# Altium PCB MBD-SM.PcbDoc
Units mm, origin at the board's own origin, x right, y up, seen from the top; angles counter-clockwise.
Board outline 160 x 184 mm, 2 copper layers (Top Layer, Bottom Layer); 73 components, 70 nets, 262 pads, 5 vias.
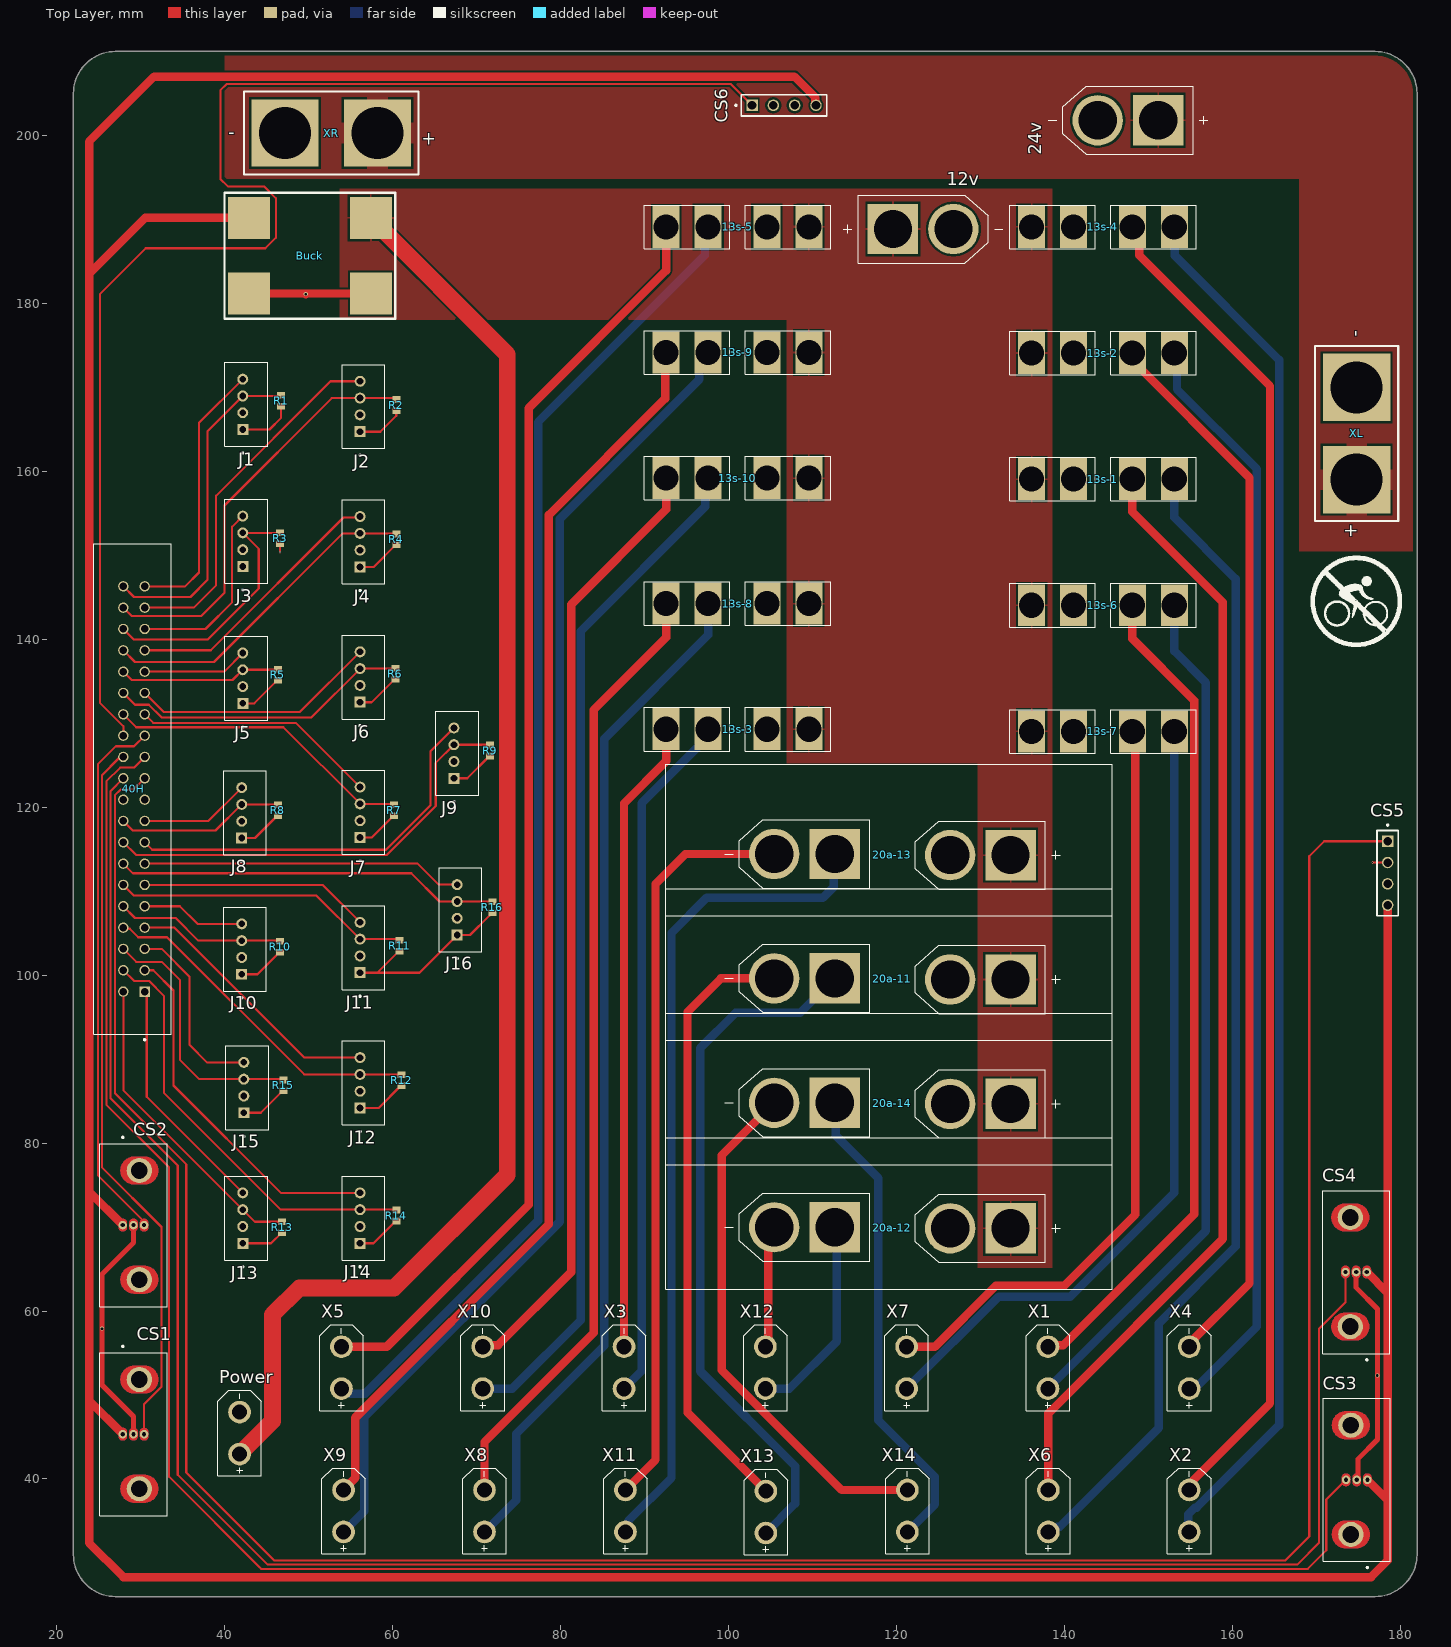
[diagram p0: Top Layer view]
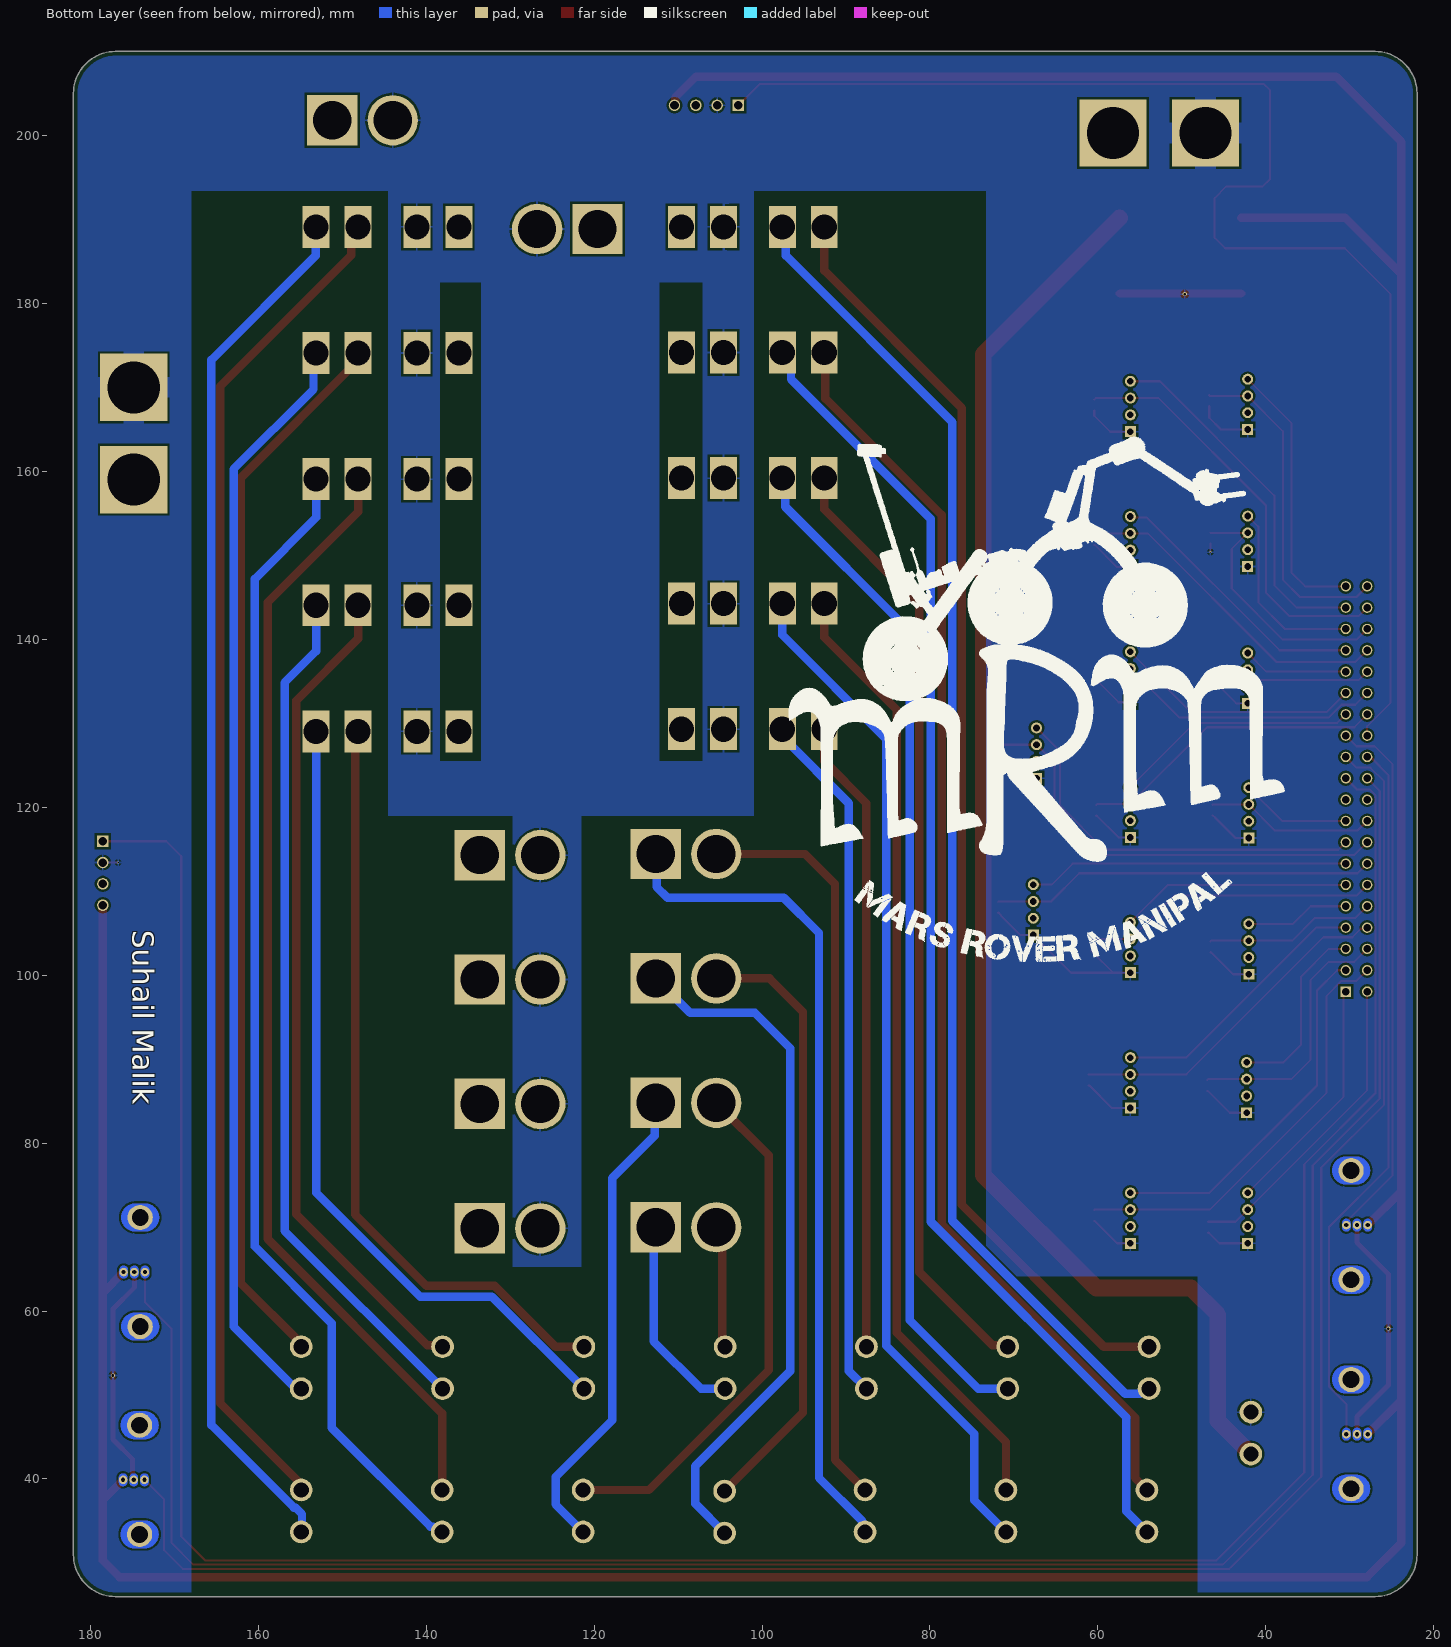
[diagram p1: Bottom Layer view, seen from below]

## Layer stack, top to bottom
Top Solder: solder mask 0.0102, Solder Resist, Dk 3.5
Top Layer: signal copper 0.0356
Dielectric 1: dielectric 0.32, FR-4, Dk 4.8
Bottom Layer: signal copper 0.0356
Bottom Solder: solder mask 0.0102, Solder Resist, Dk 3.5

## Board outline
22,31 22,205 cw(c27,205) 27,210 177,210 cw(c177,205) 182,205 182,31 cw(c177,31) 177,26 27,26 cw(c27,31)

## Design rules (kind name [scope] priority, off if disabled: settings)
Clearance [All] p1: gap=0.254 ignorepadtopadclearanceinfootprint=FALSE
PolygonConnect [All] p1: connectstyle=Relief reliefconductorwidth=0.254 reliefentries=4 polygonreliefangle="90 Angle" airgapwidth=0.254
RoutingVias [All] p1: holewidth=0.711 width=1.27 viastyle="Through Hole" minholewidth=0.01 minwidth=0.01 maxholewidth=0.711 maxwidth=1.27
SolderMaskExpansion [All] p1: expansion=0.102 istentingtop=FALSE
SupplyNets "Schematic Supply Nets" [InNet('GND')] p1: voltage=0.000
Width [All] p1: maxlimit=2 minlimit=0.254 preferedwidth=0.254 minimp=50.000000 maximp=50.000000 favimp=50.000000
30 further rules are at their usual default settings.

## Components (designator, comment, footprint, x,y, rotation, side; value= is the part's Value field where it differs from the comment)
12v "XT60-M" AMASS_XT60-M 123.19,188.849 r0 top
13s-1 "md_vertical" md_vertical 148.069,159.067 r90 top
13s-2 "md_vertical" md_vertical 148.069,174.085 r90 top
13s-3 "md_vertical" md_vertical 97.613,129.286 r270 top
13s-4 "md_vertical" md_vertical 148.069,189.103 r90 top
13s-5 "md_vertical" md_vertical 97.613,189.103 r270 top
13s-6 "md_vertical" md_vertical 148.069,144.05 r90 top
13s-7 "md_vertical" md_vertical 148.069,129.032 r90 top
13s-8 "md_vertical" md_vertical 97.613,144.24 r270 top
13s-9 "md_vertical" md_vertical 97.613,174.149 r270 top
13s-10 "md_vertical" md_vertical 97.613,159.195 r270 top
20a-11 "MD 20 A" MD20A 118.574,94.276 r0 top
20a-12 "MD 20 A" MD20A 118.574,64.643 r0 top
20a-13 "MD 20 A" MD20A 118.574,109.093 r0 top
20a-14 "MD 20 A" MD20A 118.574,79.46 r0 top
24v "XT60-M" AMASS_XT60-M 147.574,201.803 r180 top
40H "3-1761603-3" TE_3-1761603-3 30.48,98.044 r90 top
Buck "microbuck" "Micro buck" 50.165,185.674 r270 top
CS1 "WCS1700" XDCR_WCS1700 29.146,45.339 r270 top
CS2 "WCS1700" XDCR_WCS1700 29.146,70.231 r270 top
CS3 "WCS1700" XDCR_WCS1700 174.817,39.901 r90 top
CS4 "WCS1700" XDCR_WCS1700 174.752,64.643 r90 top
CS5 "MTSW-104-07-G-S-170" SAMTEC_MTSW-104-07-G-S-170 178.498,112.141 r90 top
CS6 "MTSW-104-07-G-S-170" SAMTEC_MTSW-104-07-G-S-170 106.617,203.581 r180 top
J1 "110990030" SEEED_110990030 42.164,167.973 r90 top
J2 "110990030" SEEED_110990030 56.134,167.719 r90 top
J3 "110990030" SEEED_110990030 42.164,151.67 r90 top
J4 "110990030" SEEED_110990030 56.134,151.611 r90 top
J5 "110990030" SEEED_110990030 42.164,135.366 r90 top
J6 "110990030" SEEED_110990030 56.134,135.503 r90 top
J7 "110990030" SEEED_110990030 56.134,119.396 r90 top
J8 "110990030" SEEED_110990030 42.037,119.332 r90 top
J9 "110990030" SEEED_110990030 67.31,126.444 r90 top
J10 "110990030" SEEED_110990030 42.037,103.108 r90 top
J11 "110990030" SEEED_110990030 56.134,103.288 r90 top
J12 "110990030" SEEED_110990030 56.134,87.18 r90 top
J13 "110990030" SEEED_110990030 42.164,71.072 r90 top
J14 "110990030" SEEED_110990030 56.134,71.072 r90 top
J15 "110990030" SEEED_110990030 42.291,86.614 r90 top
J16 "110990030" SEEED_110990030 67.691,107.775 r90 top
Power "XT30UPB-M" XT30UPB-M 41.783,45.466 r90 top
R1 "CRCW060310K0FKEA" RESC1609X50X30NL8T20 46.736,168.402 r270 top
R2 "CRCW060310K0FKEA" RESC1609X50X30NL8T20 60.452,167.894 r270 top
R3 "CRCW060310K0FKEA" RESC1609X50X30NL8T20 46.609,152.019 r270 top
R4 "CRCW060310K0FKEA" RESC1609X50X30NL8T20 60.452,151.892 r270 top
R5 "CRCW060310K0FKEA" RESC1609X50X30NL8T20 46.355,135.763 r270 top
R6 "CRCW060310K0FKEA" RESC1609X50X30NL8T20 60.325,135.89 r270 top
R7 "CRCW060310K0FKEA" RESC1609X50X30NL8T20 60.198,119.634 r270 top
R8 "CRCW060310K0FKEA" RESC1609X50X30NL8T20 46.355,119.649 r270 top
R9 "CRCW060310K0FKEA" RESC1609X50X30NL8T20 71.628,126.746 r270 top
R10 "CRCW060310K0FKEA" RESC1609X50X30NL8T20 46.609,103.378 r270 top
R11 "CRCW060310K0FKEA" RESC1609X50X30NL8T20 60.833,103.505 r270 top
R12 "CRCW060310K0FKEA" RESC1609X50X30NL8T20 61.087,87.503 r270 top
R13 "CRCW060310K0FKEA" RESC1609X50X30NL8T20 46.863,69.977 r270 top
R14 "CRCW060310K0FKEA" RESC1609X50X30NL8T20 60.452,71.374 r270 top
R15 "CRCW060310K0FKEA" RESC1609X50X30NL8T20 46.99,86.868 r270 top
R16 "CRCW060310K0FKEA" RESC1609X50X30NL8T20 71.882,108.077 r270 top
X1 "XT30UPB-M" XT30UPB-M 138.049,53.253 r90 top
X2 "XT30UPB-M" XT30UPB-M 154.876,36.195 r90 top
X3 "XT30UPB-M" XT30UPB-M 87.566,53.253 r90 top
X4 "XT30UPB-M" XT30UPB-M 154.876,53.253 r90 top
X5 "XT30UPB-M" XT30UPB-M 53.911,53.253 r90 top
X6 "XT30UPB-M" XT30UPB-M 138.091,36.195 r90 top
X7 "XT30UPB-M" XT30UPB-M 121.221,53.253 r90 top
X8 "XT30UPB-M" XT30UPB-M 70.951,36.195 r90 top
X9 "XT30UPB-M" XT30UPB-M 54.165,36.195 r90 top
X10 "XT30UPB-M" XT30UPB-M 70.739,53.253 r90 top
X11 "XT30UPB-M" XT30UPB-M 87.736,36.195 r90 top
X12 "XT30UPB-M" XT30UPB-M 104.394,53.253 r90 top
X13 "XT30UPB-M" XT30UPB-M 104.457,36.068 r90 top
X14 "XT30UPB-M" XT30UPB-M 121.306,36.195 r90 top
XL "xt90" xt90 174.815,164.504 r90 top
XR "xt90" xt90 52.705,200.279 r180 top

## Footprints (in the part's own frame and the unit in brackets; to place one, negate y for a bottom-side part, rotate by r counter-clockwise, add the part's x,y. Pads: shape width x height; smd on the part's side, far side on the other; paste and mask are expansions set on the pad)
AMASS_XT60-M [mm]
  round 6 hole 4.55: N(3.6,0)
  rect 6x6 / inner round 6 / far side rect 6x6 hole 4.55: P(-3.6,0)
  silkscreen extent -9.5,-4.05 9.5,4.05, body extent -7.75,-4.05 7.75,4.05, height 16
MD20A [mm]
  rect 6x6 / inner round 6 / far side rect 6x6 hole 4.55: 1(-5.925,5.334) 4(15.03,5.207)
  round 6 hole 4.55: 2(-13.125,5.334) 3(7.83,5.207)
  silkscreen extent -26.04,-2.03 27.14,16.02, body extent -17.27,1.16 19.18,9.38, height 16
md_vertical [mm]
  rect 5x3.2 hole 3: 1(0,11.97) 2(0,6.97) 3(0,-0.03) 4(0,-5.03)
  silkscreen extent -2.6,-7.63 2.6,14.57, body extent -2.6,-7.63 2.6,14.57, height 10.66
"Micro buck" [mm]
  rect 5x5 smd: 1(-4.5,7.25) 2(4.5,7.25) 3(-4.5,-7.25) 4(4.5,-7.25)
  silkscreen extent -7.5,-10.16 7.5,10.16
RESC1609X50X30NL8T20 [mm] "Chip Resistor, 2-Leads, Body 1.65x0.95mm, IPC Medium Density"
  rect 0.8x0.95 smd: 1(-0.65,0) 2(0.65,0)
  body extent -0.82,-0.48 0.82,0.48, height 0.5
SAMTEC_MTSW-104-07-G-S-170 [mm]
  rect 1.37x1.37 / inner round 1.37 / far side rect 1.37x1.37 hole 1.02: 01(3.81,0)
  round 1.37 hole 1.02: 02(1.27,0) 03(-1.27,0) 04(-3.81,0)
  silkscreen extent -5.08,-1.27 5.83,1.27
SEEED_110990030 [mm]
  rect 1.308x1.308 hole 0.8: 1(-3,0)
  round 1.308 hole 0.8: 2(-1,0) 3(1,0) 4(3,0)
  silkscreen extent -5.9,-2.95 5,2.15
TE_3-1761603-3 [mm]
  rect 1.24x1.24 hole 0.89: 1(0,0)
  round 1.24 hole 0.89: 2(0,2.54) 3(2.54,0) 4(2.54,2.54) 5(5.08,0) 6(5.08,2.54) 7(7.62,0) 8(7.62,2.54) 9(10.16,0) 10(10.16,2.54) 11(12.7,0) 12(12.7,2.54) 13(15.24,0) 14(15.24,2.54) 15(17.78,0) 16(17.78,2.54) 17(20.32,0) 18(20.32,2.54) 19(22.86,0) 20(22.86,2.54) 21(25.4,0) 22(25.4,2.54) 23(27.94,0) 24(27.94,2.54) 25(30.48,0) 26(30.48,2.54) 27(33.02,0) 28(33.02,2.54) 29(35.56,0) 30(35.56,2.54) 31(38.1,0) 32(38.1,2.54) 33(40.64,0) 34(40.64,2.54) 35(43.18,0) 36(43.18,2.54) 37(45.72,0) 38(45.72,2.54) 39(48.26,0) 40(48.26,2.54)
  silkscreen extent -5.83,-3.17 53.34,6.05
XDCR_WCS1700 [mm]
  round 1.008 hole 0.5 mask+0: 1(0,-1.27) 2(0,0) 3(0,1.27)
  round 3 hole 2 mask+0: SH1(-6.5,0.7) SH2(6.5,0.7)
  Top Layer region: 6.586,2.948 6.672,2.941 6.758,2.93 6.843,2.914 6.927,2.894 7.01,2.869 7.091,2.84 7.171,2.807 7.249,2.77 7.325,2.729 7.399,2.684 7.47,2.635 7.538,2.582 7.604,2.526 7.667,2.467 7.726,2.404 7.782,2.338 7.835,2.27 7.884,2.199 7.929,2.125 7.97,2.049 8.007,1.971 8.04,1.891 8.069,1.81 8.094,1.727 8.114,1.643 8.13,1.558 8.141,1.472 8.148,1.386 8.15,1.3 8.15,0.1 8.148,0.014 8.141,-0.072 8.13,-0.158 8.114,-0.243 8.094,-0.327 8.069,-0.41 8.04,-0.491 8.007,-0.571 7.97,-0.649 7.929,-0.725 7.884,-0.799 7.835,-0.87 7.782,-0.938 7.726,-1.004 7.667,-1.067 7.604,-1.126 7.538,-1.182 7.47,-1.235 7.399,-1.284 7.325,-1.329 7.249,-1.37 7.171,-1.407 7.091,-1.44 7.01,-1.469 6.927,-1.494 6.843,-1.514 6.758,-1.53 6.672,-1.541 6.586,-1.548 6.5,-1.55 6.414,-1.548 6.328,-1.541 6.242,-1.53 6.157,-1.514 6.073,-1.494 5.99,-1.469 5.909,-1.44 5.829,-1.407 5.751,-1.37 5.675,-1.329 5.601,-1.284 5.53,-1.235 5.462,-1.182 5.396,-1.126 5.333,-1.067 5.274,-1.004 5.218,-0.938 5.165,-0.87 5.116,-0.799 5.071,-0.725 5.03,-0.649 4.993,-0.571 4.96,-0.491 4.931,-0.41 4.906,-0.327 4.886,-0.243 4.87,-0.158 4.859,-0.072 4.852,0.014 4.85,0.1 4.85,1.3 4.852,1.386 4.859,1.472 4.87,1.558 4.886,1.643 4.906,1.727 4.931,1.81 4.96,1.891 4.993,1.971 5.03,2.049 5.071,2.125 5.116,2.199 5.165,2.27 5.218,2.338 5.274,2.404 5.333,2.467 5.396,2.526 5.462,2.582 5.53,2.635 5.601,2.684 5.675,2.729 5.751,2.77 5.829,2.807 5.909,2.84 5.99,2.869 6.073,2.894 6.157,2.914 6.242,2.93 6.328,2.941 6.414,2.948 6.5,2.95
  Top Layer region: -6.414,2.948 -6.328,2.941 -6.242,2.93 -6.157,2.914 -6.073,2.894 -5.99,2.869 -5.909,2.84 -5.829,2.807 -5.751,2.77 -5.675,2.729 -5.601,2.684 -5.53,2.635 -5.462,2.582 -5.396,2.526 -5.333,2.467 -5.274,2.404 -5.218,2.338 -5.165,2.27 -5.116,2.199 -5.071,2.125 -5.03,2.049 -4.993,1.971 -4.96,1.891 -4.931,1.81 -4.906,1.727 -4.886,1.643 -4.87,1.558 -4.859,1.472 -4.852,1.386 -4.85,1.3 -4.85,0.1 -4.852,0.014 -4.859,-0.072 -4.87,-0.158 -4.886,-0.243 -4.906,-0.327 -4.931,-0.41 -4.96,-0.491 -4.993,-0.571 -5.03,-0.649 -5.071,-0.725 -5.116,-0.799 -5.165,-0.87 -5.218,-0.938 -5.274,-1.004 -5.333,-1.067 -5.396,-1.126 -5.462,-1.182 -5.53,-1.235 -5.601,-1.284 -5.675,-1.329 -5.751,-1.37 -5.829,-1.407 -5.909,-1.44 -5.99,-1.469 -6.073,-1.494 -6.157,-1.514 -6.242,-1.53 -6.328,-1.541 -6.414,-1.548 -6.5,-1.55 -6.586,-1.548 -6.672,-1.541 -6.758,-1.53 -6.843,-1.514 -6.927,-1.494 -7.01,-1.469 -7.091,-1.44 -7.171,-1.407 -7.249,-1.37 -7.325,-1.329 -7.399,-1.284 -7.47,-1.235 -7.538,-1.182 -7.604,-1.126 -7.667,-1.067 -7.726,-1.004 -7.782,-0.938 -7.835,-0.87 -7.884,-0.799 -7.929,-0.725 -7.97,-0.649 -8.007,-0.571 -8.04,-0.491 -8.069,-0.41 -8.094,-0.327 -8.114,-0.243 -8.13,-0.158 -8.141,-0.072 -8.148,0.014 -8.15,0.1 -8.15,1.3 -8.148,1.386 -8.141,1.472 -8.13,1.558 -8.114,1.643 -8.094,1.727 -8.069,1.81 -8.04,1.891 -8.007,1.971 -7.97,2.049 -7.929,2.125 -7.884,2.199 -7.835,2.27 -7.782,2.338 -7.726,2.404 -7.667,2.467 -7.604,2.526 -7.538,2.582 -7.47,2.635 -7.399,2.684 -7.325,2.729 -7.249,2.77 -7.171,2.807 -7.091,2.84 -7.01,2.869 -6.927,2.894 -6.843,2.914 -6.758,2.93 -6.672,2.941 -6.586,2.948 -6.5,2.95
  Top Layer region: 0.276,-0.771 0.302,-0.773 0.328,-0.776 0.354,-0.781 0.379,-0.787 0.405,-0.794 0.429,-0.803 0.453,-0.813 0.477,-0.824 0.5,-0.837 0.522,-0.851 0.544,-0.865 0.565,-0.881 0.585,-0.898 0.604,-0.916 0.622,-0.935 0.639,-0.955 0.655,-0.976 0.669,-0.998 0.683,-1.02 0.696,-1.043 0.707,-1.067 0.717,-1.091 0.726,-1.115 0.733,-1.141 0.739,-1.166 0.744,-1.192 0.747,-1.218 0.749,-1.244 0.75,-1.27 0.749,-1.296 0.747,-1.322 0.744,-1.348 0.739,-1.374 0.733,-1.399 0.726,-1.425 0.717,-1.449 0.707,-1.473 0.696,-1.497 0.683,-1.52 0.669,-1.542 0.655,-1.564 0.639,-1.585 0.622,-1.605 0.604,-1.624 0.585,-1.642 0.565,-1.659 0.544,-1.675 0.522,-1.689 0.5,-1.703 0.477,-1.716 0.453,-1.727 0.429,-1.737 0.405,-1.746 0.379,-1.753 0.354,-1.759 0.328,-1.764 0.302,-1.767 0.276,-1.769 0.25,-1.77 -0.25,-1.77 -0.276,-1.769 -0.302,-1.767 -0.328,-1.764 -0.354,-1.759 -0.379,-1.753 -0.405,-1.746 -0.429,-1.737 -0.453,-1.727 -0.477,-1.716 -0.5,-1.703 -0.522,-1.689 -0.544,-1.675 -0.565,-1.659 -0.585,-1.642 -0.604,-1.624 -0.622,-1.605 -0.639,-1.585 -0.655,-1.564 -0.669,-1.542 -0.683,-1.52 -0.696,-1.497 -0.707,-1.473 -0.717,-1.449 -0.726,-1.425 -0.733,-1.399 -0.739,-1.374 -0.744,-1.348 -0.747,-1.322 -0.749,-1.296 -0.75,-1.27 -0.749,-1.244 -0.747,-1.218 -0.744,-1.192 -0.739,-1.166 -0.733,-1.141 -0.726,-1.115 -0.717,-1.091 -0.707,-1.067 -0.696,-1.043 -0.683,-1.02 -0.669,-0.998 -0.655,-0.976 -0.639,-0.955 -0.622,-0.935 -0.604,-0.916 -0.585,-0.898 -0.565,-0.881 -0.544,-0.865 -0.522,-0.851 -0.5,-0.837 -0.477,-0.824 -0.453,-0.813 -0.429,-0.803 -0.405,-0.794 -0.379,-0.787 -0.354,-0.781 -0.328,-0.776 -0.302,-0.773 -0.276,-0.771 -0.25,-0.77 0.25,-0.77
  Top Layer region: 0.276,0.499 0.302,0.497 0.328,0.494 0.354,0.489 0.379,0.483 0.405,0.476 0.429,0.467 0.453,0.457 0.477,0.446 0.5,0.433 0.522,0.419 0.544,0.405 0.565,0.389 0.585,0.372 0.604,0.354 0.622,0.335 0.639,0.315 0.655,0.294 0.669,0.272 0.683,0.25 0.696,0.227 0.707,0.203 0.717,0.179 0.726,0.155 0.733,0.129 0.739,0.104 0.744,0.078 0.747,0.052 0.749,0.026 0.75,0 0.749,-0.026 0.747,-0.052 0.744,-0.078 0.739,-0.104 0.733,-0.129 0.726,-0.155 0.717,-0.179 0.707,-0.203 0.696,-0.227 0.683,-0.25 0.669,-0.272 0.655,-0.294 0.639,-0.315 0.622,-0.335 0.604,-0.354 0.585,-0.372 0.565,-0.389 0.544,-0.405 0.522,-0.419 0.5,-0.433 0.477,-0.446 0.453,-0.457 0.429,-0.467 0.405,-0.476 0.379,-0.483 0.354,-0.489 0.328,-0.494 0.302,-0.497 0.276,-0.499 0.25,-0.5 -0.25,-0.5 -0.276,-0.499 -0.302,-0.497 -0.328,-0.494 -0.354,-0.489 -0.379,-0.483 -0.405,-0.476 -0.429,-0.467 -0.453,-0.457 -0.477,-0.446 -0.5,-0.433 -0.522,-0.419 -0.544,-0.405 -0.565,-0.389 -0.585,-0.372 -0.604,-0.354 -0.622,-0.335 -0.639,-0.315 -0.655,-0.294 -0.669,-0.272 -0.683,-0.25 -0.696,-0.227 -0.707,-0.203 -0.717,-0.179 -0.726,-0.155 -0.733,-0.129 -0.739,-0.104 -0.744,-0.078 -0.747,-0.052 -0.749,-0.026 -0.75,0 -0.749,0.026 -0.747,0.052 -0.744,0.078 -0.739,0.104 -0.733,0.129 -0.726,0.155 -0.717,0.179 -0.707,0.203 -0.696,0.227 -0.683,0.25 -0.669,0.272 -0.655,0.294 -0.639,0.315 -0.622,0.335 -0.604,0.354 -0.585,0.372 -0.565,0.389 -0.544,0.405 -0.522,0.419 -0.5,0.433 -0.477,0.446 -0.453,0.457 -0.429,0.467 -0.405,0.476 -0.379,0.483 -0.354,0.489 -0.328,0.494 -0.302,0.497 -0.276,0.499 -0.25,0.5 0.25,0.5
  Top Layer region: 0.276,1.769 0.302,1.767 0.328,1.764 0.354,1.759 0.379,1.753 0.405,1.746 0.429,1.737 0.453,1.727 0.477,1.716 0.5,1.703 0.522,1.689 0.544,1.675 0.565,1.659 0.585,1.642 0.604,1.624 0.622,1.605 0.639,1.585 0.655,1.564 0.669,1.542 0.683,1.52 0.696,1.497 0.707,1.473 0.717,1.449 0.726,1.425 0.733,1.399 0.739,1.374 0.744,1.348 0.747,1.322 0.749,1.296 0.75,1.27 0.749,1.244 0.747,1.218 0.744,1.192 0.739,1.166 0.733,1.141 0.726,1.115 0.717,1.091 0.707,1.067 0.696,1.043 0.683,1.02 0.669,0.998 0.655,0.976 0.639,0.955 0.622,0.935 0.604,0.916 0.585,0.898 0.565,0.881 0.544,0.865 0.522,0.851 0.5,0.837 0.477,0.824 0.453,0.813 0.429,0.803 0.405,0.794 0.379,0.787 0.354,0.781 0.328,0.776 0.302,0.773 0.276,0.771 0.25,0.77 -0.25,0.77 -0.276,0.771 -0.302,0.773 -0.328,0.776 -0.354,0.781 -0.379,0.787 -0.405,0.794 -0.429,0.803 -0.453,0.813 -0.477,0.824 -0.5,0.837 -0.522,0.851 -0.544,0.865 -0.565,0.881 -0.585,0.898 -0.604,0.916 -0.622,0.935 -0.639,0.955 -0.655,0.976 -0.669,0.998 -0.683,1.02 -0.696,1.043 -0.707,1.067 -0.717,1.091 -0.726,1.115 -0.733,1.141 -0.739,1.166 -0.744,1.192 -0.747,1.218 -0.749,1.244 -0.75,1.27 -0.749,1.296 -0.747,1.322 -0.744,1.348 -0.739,1.374 -0.733,1.399 -0.726,1.425 -0.717,1.449 -0.707,1.473 -0.696,1.497 -0.683,1.52 -0.669,1.542 -0.655,1.564 -0.639,1.585 -0.622,1.605 -0.604,1.624 -0.585,1.642 -0.565,1.659 -0.544,1.675 -0.522,1.689 -0.5,1.703 -0.477,1.716 -0.453,1.727 -0.429,1.737 -0.405,1.746 -0.379,1.753 -0.354,1.759 -0.328,1.764 -0.302,1.767 -0.276,1.769 -0.25,1.77 0.25,1.77
  Bottom Layer region: 6.586,2.948 6.672,2.941 6.758,2.93 6.843,2.914 6.927,2.894 7.01,2.869 7.091,2.84 7.171,2.807 7.249,2.77 7.325,2.729 7.399,2.684 7.47,2.635 7.538,2.582 7.604,2.526 7.667,2.467 7.726,2.404 7.782,2.338 7.835,2.27 7.884,2.199 7.929,2.125 7.97,2.049 8.007,1.971 8.04,1.891 8.069,1.81 8.094,1.727 8.114,1.643 8.13,1.558 8.141,1.472 8.148,1.386 8.15,1.3 8.15,0.1 8.148,0.014 8.141,-0.072 8.13,-0.158 8.114,-0.243 8.094,-0.327 8.069,-0.41 8.04,-0.491 8.007,-0.571 7.97,-0.649 7.929,-0.725 7.884,-0.799 7.835,-0.87 7.782,-0.938 7.726,-1.004 7.667,-1.067 7.604,-1.126 7.538,-1.182 7.47,-1.235 7.399,-1.284 7.325,-1.329 7.249,-1.37 7.171,-1.407 7.091,-1.44 7.01,-1.469 6.927,-1.494 6.843,-1.514 6.758,-1.53 6.672,-1.541 6.586,-1.548 6.5,-1.55 6.414,-1.548 6.328,-1.541 6.242,-1.53 6.157,-1.514 6.073,-1.494 5.99,-1.469 5.909,-1.44 5.829,-1.407 5.751,-1.37 5.675,-1.329 5.601,-1.284 5.53,-1.235 5.462,-1.182 5.396,-1.126 5.333,-1.067 5.274,-1.004 5.218,-0.938 5.165,-0.87 5.116,-0.799 5.071,-0.725 5.03,-0.649 4.993,-0.571 4.96,-0.491 4.931,-0.41 4.906,-0.327 4.886,-0.243 4.87,-0.158 4.859,-0.072 4.852,0.014 4.85,0.1 4.85,1.3 4.852,1.386 4.859,1.472 4.87,1.558 4.886,1.643 4.906,1.727 4.931,1.81 4.96,1.891 4.993,1.971 5.03,2.049 5.071,2.125 5.116,2.199 5.165,2.27 5.218,2.338 5.274,2.404 5.333,2.467 5.396,2.526 5.462,2.582 5.53,2.635 5.601,2.684 5.675,2.729 5.751,2.77 5.829,2.807 5.909,2.84 5.99,2.869 6.073,2.894 6.157,2.914 6.242,2.93 6.328,2.941 6.414,2.948 6.5,2.95
  Bottom Layer region: -6.414,2.948 -6.328,2.941 -6.242,2.93 -6.157,2.914 -6.073,2.894 -5.99,2.869 -5.909,2.84 -5.829,2.807 -5.751,2.77 -5.675,2.729 -5.601,2.684 -5.53,2.635 -5.462,2.582 -5.396,2.526 -5.333,2.467 -5.274,2.404 -5.218,2.338 -5.165,2.27 -5.116,2.199 -5.071,2.125 -5.03,2.049 -4.993,1.971 -4.96,1.891 -4.931,1.81 -4.906,1.727 -4.886,1.643 -4.87,1.558 -4.859,1.472 -4.852,1.386 -4.85,1.3 -4.85,0.1 -4.852,0.014 -4.859,-0.072 -4.87,-0.158 -4.886,-0.243 -4.906,-0.327 -4.931,-0.41 -4.96,-0.491 -4.993,-0.571 -5.03,-0.649 -5.071,-0.725 -5.116,-0.799 -5.165,-0.87 -5.218,-0.938 -5.274,-1.004 -5.333,-1.067 -5.396,-1.126 -5.462,-1.182 -5.53,-1.235 -5.601,-1.284 -5.675,-1.329 -5.751,-1.37 -5.829,-1.407 -5.909,-1.44 -5.99,-1.469 -6.073,-1.494 -6.157,-1.514 -6.242,-1.53 -6.328,-1.541 -6.414,-1.548 -6.5,-1.55 -6.586,-1.548 -6.672,-1.541 -6.758,-1.53 -6.843,-1.514 -6.927,-1.494 -7.01,-1.469 -7.091,-1.44 -7.171,-1.407 -7.249,-1.37 -7.325,-1.329 -7.399,-1.284 -7.47,-1.235 -7.538,-1.182 -7.604,-1.126 -7.667,-1.067 -7.726,-1.004 -7.782,-0.938 -7.835,-0.87 -7.884,-0.799 -7.929,-0.725 -7.97,-0.649 -8.007,-0.571 -8.04,-0.491 -8.069,-0.41 -8.094,-0.327 -8.114,-0.243 -8.13,-0.158 -8.141,-0.072 -8.148,0.014 -8.15,0.1 -8.15,1.3 -8.148,1.386 -8.141,1.472 -8.13,1.558 -8.114,1.643 -8.094,1.727 -8.069,1.81 -8.04,1.891 -8.007,1.971 -7.97,2.049 -7.929,2.125 -7.884,2.199 -7.835,2.27 -7.782,2.338 -7.726,2.404 -7.667,2.467 -7.604,2.526 -7.538,2.582 -7.47,2.635 -7.399,2.684 -7.325,2.729 -7.249,2.77 -7.171,2.807 -7.091,2.84 -7.01,2.869 -6.927,2.894 -6.843,2.914 -6.758,2.93 -6.672,2.941 -6.586,2.948 -6.5,2.95
  Bottom Layer region: 0.276,-0.771 0.302,-0.773 0.328,-0.776 0.354,-0.781 0.379,-0.787 0.405,-0.794 0.429,-0.803 0.453,-0.813 0.477,-0.824 0.5,-0.837 0.522,-0.851 0.544,-0.865 0.565,-0.881 0.585,-0.898 0.604,-0.916 0.622,-0.935 0.639,-0.955 0.655,-0.976 0.669,-0.998 0.683,-1.02 0.696,-1.043 0.707,-1.067 0.717,-1.091 0.726,-1.115 0.733,-1.141 0.739,-1.166 0.744,-1.192 0.747,-1.218 0.749,-1.244 0.75,-1.27 0.749,-1.296 0.747,-1.322 0.744,-1.348 0.739,-1.374 0.733,-1.399 0.726,-1.425 0.717,-1.449 0.707,-1.473 0.696,-1.497 0.683,-1.52 0.669,-1.542 0.655,-1.564 0.639,-1.585 0.622,-1.605 0.604,-1.624 0.585,-1.642 0.565,-1.659 0.544,-1.675 0.522,-1.689 0.5,-1.703 0.477,-1.716 0.453,-1.727 0.429,-1.737 0.405,-1.746 0.379,-1.753 0.354,-1.759 0.328,-1.764 0.302,-1.767 0.276,-1.769 0.25,-1.77 -0.25,-1.77 -0.276,-1.769 -0.302,-1.767 -0.328,-1.764 -0.354,-1.759 -0.379,-1.753 -0.405,-1.746 -0.429,-1.737 -0.453,-1.727 -0.477,-1.716 -0.5,-1.703 -0.522,-1.689 -0.544,-1.675 -0.565,-1.659 -0.585,-1.642 -0.604,-1.624 -0.622,-1.605 -0.639,-1.585 -0.655,-1.564 -0.669,-1.542 -0.683,-1.52 -0.696,-1.497 -0.707,-1.473 -0.717,-1.449 -0.726,-1.425 -0.733,-1.399 -0.739,-1.374 -0.744,-1.348 -0.747,-1.322 -0.749,-1.296 -0.75,-1.27 -0.749,-1.244 -0.747,-1.218 -0.744,-1.192 -0.739,-1.166 -0.733,-1.141 -0.726,-1.115 -0.717,-1.091 -0.707,-1.067 -0.696,-1.043 -0.683,-1.02 -0.669,-0.998 -0.655,-0.976 -0.639,-0.955 -0.622,-0.935 -0.604,-0.916 -0.585,-0.898 -0.565,-0.881 -0.544,-0.865 -0.522,-0.851 -0.5,-0.837 -0.477,-0.824 -0.453,-0.813 -0.429,-0.803 -0.405,-0.794 -0.379,-0.787 -0.354,-0.781 -0.328,-0.776 -0.302,-0.773 -0.276,-0.771 -0.25,-0.77 0.25,-0.77
  Bottom Layer region: 0.276,0.499 0.302,0.497 0.328,0.494 0.354,0.489 0.379,0.483 0.405,0.476 0.429,0.467 0.453,0.457 0.477,0.446 0.5,0.433 0.522,0.419 0.544,0.405 0.565,0.389 0.585,0.372 0.604,0.354 0.622,0.335 0.639,0.315 0.655,0.294 0.669,0.272 0.683,0.25 0.696,0.227 0.707,0.203 0.717,0.179 0.726,0.155 0.733,0.129 0.739,0.104 0.744,0.078 0.747,0.052 0.749,0.026 0.75,0 0.749,-0.026 0.747,-0.052 0.744,-0.078 0.739,-0.104 0.733,-0.129 0.726,-0.155 0.717,-0.179 0.707,-0.203 0.696,-0.227 0.683,-0.25 0.669,-0.272 0.655,-0.294 0.639,-0.315 0.622,-0.335 0.604,-0.354 0.585,-0.372 0.565,-0.389 0.544,-0.405 0.522,-0.419 0.5,-0.433 0.477,-0.446 0.453,-0.457 0.429,-0.467 0.405,-0.476 0.379,-0.483 0.354,-0.489 0.328,-0.494 0.302,-0.497 0.276,-0.499 0.25,-0.5 -0.25,-0.5 -0.276,-0.499 -0.302,-0.497 -0.328,-0.494 -0.354,-0.489 -0.379,-0.483 -0.405,-0.476 -0.429,-0.467 -0.453,-0.457 -0.477,-0.446 -0.5,-0.433 -0.522,-0.419 -0.544,-0.405 -0.565,-0.389 -0.585,-0.372 -0.604,-0.354 -0.622,-0.335 -0.639,-0.315 -0.655,-0.294 -0.669,-0.272 -0.683,-0.25 -0.696,-0.227 -0.707,-0.203 -0.717,-0.179 -0.726,-0.155 -0.733,-0.129 -0.739,-0.104 -0.744,-0.078 -0.747,-0.052 -0.749,-0.026 -0.75,0 -0.749,0.026 -0.747,0.052 -0.744,0.078 -0.739,0.104 -0.733,0.129 -0.726,0.155 -0.717,0.179 -0.707,0.203 -0.696,0.227 -0.683,0.25 -0.669,0.272 -0.655,0.294 -0.639,0.315 -0.622,0.335 -0.604,0.354 -0.585,0.372 -0.565,0.389 -0.544,0.405 -0.522,0.419 -0.5,0.433 -0.477,0.446 -0.453,0.457 -0.429,0.467 -0.405,0.476 -0.379,0.483 -0.354,0.489 -0.328,0.494 -0.302,0.497 -0.276,0.499 -0.25,0.5 0.25,0.5
  Bottom Layer region: 0.276,1.769 0.302,1.767 0.328,1.764 0.354,1.759 0.379,1.753 0.405,1.746 0.429,1.737 0.453,1.727 0.477,1.716 0.5,1.703 0.522,1.689 0.544,1.675 0.565,1.659 0.585,1.642 0.604,1.624 0.622,1.605 0.639,1.585 0.655,1.564 0.669,1.542 0.683,1.52 0.696,1.497 0.707,1.473 0.717,1.449 0.726,1.425 0.733,1.399 0.739,1.374 0.744,1.348 0.747,1.322 0.749,1.296 0.75,1.27 0.749,1.244 0.747,1.218 0.744,1.192 0.739,1.166 0.733,1.141 0.726,1.115 0.717,1.091 0.707,1.067 0.696,1.043 0.683,1.02 0.669,0.998 0.655,0.976 0.639,0.955 0.622,0.935 0.604,0.916 0.585,0.898 0.565,0.881 0.544,0.865 0.522,0.851 0.5,0.837 0.477,0.824 0.453,0.813 0.429,0.803 0.405,0.794 0.379,0.787 0.354,0.781 0.328,0.776 0.302,0.773 0.276,0.771 0.25,0.77 -0.25,0.77 -0.276,0.771 -0.302,0.773 -0.328,0.776 -0.354,0.781 -0.379,0.787 -0.405,0.794 -0.429,0.803 -0.453,0.813 -0.477,0.824 -0.5,0.837 -0.522,0.851 -0.544,0.865 -0.565,0.881 -0.585,0.898 -0.604,0.916 -0.622,0.935 -0.639,0.955 -0.655,0.976 -0.669,0.998 -0.683,1.02 -0.696,1.043 -0.707,1.067 -0.717,1.091 -0.726,1.115 -0.733,1.141 -0.739,1.166 -0.744,1.192 -0.747,1.218 -0.749,1.244 -0.75,1.27 -0.749,1.296 -0.747,1.322 -0.744,1.348 -0.739,1.374 -0.733,1.399 -0.726,1.425 -0.717,1.449 -0.707,1.473 -0.696,1.497 -0.683,1.52 -0.669,1.542 -0.655,1.564 -0.639,1.585 -0.622,1.605 -0.604,1.624 -0.585,1.642 -0.565,1.659 -0.544,1.675 -0.522,1.689 -0.5,1.703 -0.477,1.716 -0.453,1.727 -0.429,1.737 -0.405,1.746 -0.379,1.753 -0.354,1.759 -0.328,1.764 -0.302,1.767 -0.276,1.769 -0.25,1.77 0.25,1.77
  silkscreen extent -10.55,-4 9.7,4
XT30UPB-M [mm]
  round 2.7 hole 1.8: P$1(-2.5,0) P$2(2.5,0)
  silkscreen extent -5.1,-2.6 5.1,2.6
xt90 [mm]
  rect 8x8 hole 6.2: 1(-5.5,0) 2(5.5,0)
  silkscreen extent -10.4,-4.95 10.4,4.95

## Part data
12v 24v: "Plug; DC supply; XT60; male; PIN: 2; for cable; soldered; 30A; 500V", Package=Package, Check_prices=https://www.snapeda.com/parts/XT60-M/AMASS/view-part/?ref=eda, MF=AMASS, MP=XT60-M, SnapEDA_Link=https://www.snapeda.com/parts/XT60-M/AMASS/view-part/?ref=snap
20a-11 20a-12 20a-13 20a-14: library part MD20A
40H: "AMP-LATCH 40 Position 2.54 mm Dual Row Through-Hole Straight Pin Header", Package=None, Availability=Unavailable, Centerline_Pitch="2.54 mm[.1 in]", DigiKey-Purchase-URL=https://snapeda.com/shop?store=DigiKey&id=379325, EU_RoHS_Compliance=Compliant, MF="TE Connectivity", MP=3-1761603-3, Number_of_Positions=40, Price=None, Product_Type=Connector, SnapEDA_Link=https://www.snapeda.com/parts/3-1761603-3/TE%20Connectivity%20AMP%20Connectors/view-part/379325/?ref=snap
CS1 CS2 CS3 CS4: "The Winson WCS1700 current sensor provides economical and precisesolution for both DC and AC current sensing in industrial, commercial andcommunications systems.", Package=Package, Check_prices=https://www.snapeda.com/parts/WCS1700/Winson/view-part/?ref=eda, MF=Winson, MP=WCS1700, SnapEDA_Link=https://www.snapeda.com/parts/WCS1700/Winson/view-part/?ref=snap
CS5 CS6: Package=None, Availability=Unavailable, MP=MTSW-104-07-G-S-170, Price=None
J1 J2 J3 J4 J5 J6 J7 J8 J9 J10 J11 J12 J13 J14 J15 J16: "GROVE 2MM 4PIN VERT CONN 10PCS", Package=None, Arrow_Electronics-Purchase-URL=https://snapeda.com/shop?store=Arrow+Electronics&id=583576, Availability=Good, MF="Seeed Technology", Mouser-Purchase-URL=https://snapeda.com/shop?store=Mouser&id=583576, MP=110990030, Price=None, SnapEDA_Link=https://www.snapeda.com/parts/110990030/Seeed%20Technology%20Co.,%20Ltd/view-part/583576/?ref=snap
Power X1 X2 X3 X4 X5 X6 X7 X8 X9 X10 X11 X12 X13 X14: "Socket; DC supply; XT30; male; PIN: 2; on PCBs; THT; yellow; 15A; 500V", Package=None, Availability="Not in stock", Check_prices=https://www.snapeda.com/parts/XT30UPB-M/AMASS/view-part/?ref=eda, MF=amass, MP=XT30UPB-M, Price=None, SnapEDA_Link=https://www.snapeda.com/parts/XT30UPB-M/AMASS/view-part/?ref=snap
R1 R2 R3 R4 R5 R6 R7 R8 R9 R10 R11 R12 R13 R14 R15 R16: library part CMP-1666-00005-4, "Chip Resistor, 10 KOhm, +/- 1%, 100 mW, -55 to 155 degC, 0603 (1608 Metric), RoHS, Tape and Reel", Manufacturer="Vishay Semiconductor", Max Operating Temperature="155 degC", Min Operating Temperature="-55 degC", Package Quantity=5000, Voltage Rating="75 V", ComponentLink1Description="Manufacturer URL", ComponentLink1URL=http://www.vishay.com/, ComponentLink2Description=Datasheet, ComponentLink2URL=https://datasheet.ciiva.com/11809/0900766b80d98afc-11809037.pdf, DatasheetVersion=06/2012, Height="0.45 mm", Length="1.55 mm", Mounting Technology="Surface Mount", PackageDescription="2-Pin Surface Mount Device, Body 1.575 x 0.85 mm", PackageReference=0603, Packaging="Tape and Reel", REACH SVHC=Unknown, RoHSCompliant=true

## Via types
v1: diameter 0.5, hole 0.3, Top Layer to Bottom Layer, 3 vias
v2: diameter 0.25, hole 0.15, Top Layer to Bottom Layer, 2 vias

## Nets (pads, with @x,y where several pads share a name; then routed paths per layer and width w, separated by ;. In a path a pad name is that pad's centre, name@x,y a point inside that pad or via, vN(x,y) a via of type N, cw(c..) or ccw(c..) an arc to the next point about the centre after c; other vN are vias at no path point)
GND: 12v.N 13s-1.2 13s-2.2 13s-3.2 13s-4.2 13s-5.2 13s-6.2 13s-7.2 13s-8.2 13s-9.2 13s-10.2 20a-11.3 20a-12.3 20a-13.3 20a-14.3 24v.N Buck.2 Buck.4 CS1.2 CS2.2 CS3.2 CS4.2 CS5.02 CS6.02 J1.1 J2.1 J3.1 J4.1 J5.1 J6.1 J7.1 J8.1 J9.1 J10.1 J11.1 J12.1 J13.1 J14.1 J15.1 J16.1 Power.P$2 R1.2 R2.2 R3.2 R4.2 R5.2 R6.2 R7.2 R8.2 R9.2 R10.2 R11.2 R12.2 R13.2 R14.2 R15.2 R16.2 XL.2 XR.2 | length 167.1
  Top Layer w0.254: J10.1 43.914,100.108 46.534,102.728 R10.2 ; J8.1 43.624,116.332 46.007,118.715 46.007,118.726 46.28,118.999 R8.2 ; J13.1 45.533,68.072 46.788,69.327 R13.2 ; J5.1 43.533,132.366 46.28,135.113 R5.2 ; J1.1 45.339,164.973 46.736,166.37 R1.2 ; J15.1 44.311,83.614 46.915,86.218 R15.2 ; v2(46.609,150.368) R3.2 ; J14.1 57.725,68.072 60.377,70.724 R14.2 ; J12.1 58.339,84.18 61.012,86.853 R12.2 ; J11.1 58.191,100.288 ; J7.1 57.535,116.396 60.123,118.984 R7.2 ; J6.1 57.513,132.503 60.25,135.24 R6.2 ; J4.1 57.746,148.611 60.377,151.242 R4.2 ; J2.1 58.547,164.719 60.44,166.612 60.44,167.232 R2.2 ; R11.2 60.758,102.855 58.191,100.288 ; J9.1 68.901,123.444 71.553,126.096 R9.2 ; R16.2 71.807,107.427 71.534,107.154 71.534,107.079 69.23,104.775 J16.1 63.204,100.288 58.191,100.288 ; v2(176.677,113.411) CS5.02
  Top Layer w0.6: CS1.2 29.146,47.434 25.4,51.181 25.4,64.389 29.146,68.135 CS2.2 ; CS4.2 174.752,62.785 177.292,60.245 177.292,44.704 174.984,42.396 174.984,40 174.885,39.901 CS3.2
  Top Layer w1: Buck.4 49.585,181.174 v1(49.657,181.102) 49.729,181.174 Buck.2
  other v1: 177.292,52.324 25.4,57.912
Net12v_P: 12v.P 13s-1.1 13s-2.1 13s-3.1 13s-4.1 13s-5.1 13s-6.1 13s-7.1 13s-8.1 13s-9.1 13s-10.1 20a-11.4 20a-12.4 20a-13.4 20a-14.4 Buck.1 Power.P$1 | length 173.8
  Top Layer w2: Power.P$1 45.72,46.903 45.72,59.563 48.895,62.738 60.198,62.738 73.66,76.2 73.66,173.929 Buck.1
Net13s-1_3: 13s-1.3 X6.P$2 | length 133.4
  Top Layer w1: X6.P$2 138.091,47.82 158.877,68.606 158.877,144.399 148.099,155.177 13s-1.3
Net13s-1_4: 13s-1.4 X6.P$1 | length 138.1
  Bottom Layer w1: X6.P$1 138.551,33.695 139.187,34.33 139.486,34.33 151.257,46.101 151.257,58.547 160.401,67.691 160.401,147.193 153.099,154.495 13s-1.4
Net13s-2_3: 13s-2.3 X4.P$2 | length 127.1
  Top Layer w1: 13s-2.3 148.099,173.185 162.052,159.232 162.052,63.299 154.876,56.123 X4.P$2
Net13s-2_4: 13s-2.4 X4.P$1 | length 131.1
  Bottom Layer w1: 13s-2.4 153.416,173.768 153.416,169.765 162.924,160.257 162.924,58.166 155.837,51.078 155.202,51.078 X4.P$1
Net13s-3_3: 13s-3.3 X3.P$1 | length 82.7
  Bottom Layer w1: X3.P$1 89.67,52.857 89.67,120.474 97.583,128.386 13s-3.3
Net13s-3_4: 13s-3.4 X3.P$2 | length 75.6
  Top Layer w1: X3.P$2 87.566,120.459 92.583,125.476 13s-3.4
Net13s-4_3: 13s-4.3 X2.P$2 | length 161.2
  Top Layer w1: 13s-4.3 148.931,188.271 148.931,185.714 164.496,170.149 164.496,49 155.202,39.706 155.202,39.02 X2.P$2
Net13s-4_4: 13s-4.4 X2.P$1 | length 165.2
  Bottom Layer w1: 13s-4.4 153.147,189.054 153.147,185.689 165.574,173.262 165.574,46.417 155.748,36.591 155.546,36.591 154.778,35.824 154.778,33.793 X2.P$1
Net13s-5_3: 13s-5.3 X5.P$1 | length 159
  Bottom Layer w1: X5.P$1 54.372,50.753 54.974,50.15 56.743,50.15 77.343,70.75 77.343,165.862 97.17,185.689 97.17,188.69 13s-5.3
Net13s-5_4: 13s-5.4 X5.P$2 | length 152.5
  Top Layer w1: X5.P$2 59.309,55.753 76.2,72.644 76.2,167.513 92.583,183.896 13s-5.4
Net13s-6_3: 13s-6.3 X1.P$2 | length 99.5
  Top Layer w1: X1.P$2 138.239,55.943 139.89,55.943 155.453,71.506 155.453,132.71 148.099,140.064 13s-6.3
Net13s-6_4: 13s-6.4 X1.P$1 | length 102.6
  Bottom Layer w1: X1.P$1 156.845,69.549 156.845,134.831 153.099,138.578 13s-6.4
Net13s-7_3: 13s-7.3 X7.P$2 | length 91.4
  Top Layer w1: X7.P$2 124.587,55.753 131.826,62.992 139.954,62.992 148.463,71.501 148.463,128.668 13s-7.3
Net13s-7_4: 13s-7.4 X7.P$1 | length 96.5
  Bottom Layer w1: X7.P$1 132.19,61.722 140.716,61.722 153.099,74.105 13s-7.4
Net13s-8_3: 13s-8.3 X8.P$1 | length 121.6
  Bottom Layer w1: X8.P$1 74.716,37.46 74.716,45.379 85.225,55.888 85.225,128.151 97.583,140.509 13s-8.3
Net13s-8_4: 13s-8.4 X8.P$2 | length 114.5
  Top Layer w1: X8.P$2 70.951,44.408 83.947,57.404 83.947,131.572 92.583,140.208 13s-8.4
Net13s-9_3: 13s-9.3 X9.P$1 | length 158.4
  Bottom Layer w1: X9.P$1 56.642,36.171 56.642,47.371 79.908,70.637 79.908,154.33 96.544,170.966 96.544,173.11 13s-9.3
Net13s-9_4: 13s-9.4 X9.P$2 | length 151.4
  Top Layer w1: X9.P$2 54.165,38.734 55.562,40.131 55.562,47.292 78.613,70.343 78.613,154.813 92.456,168.656 92.456,174.022 13s-9.4
Net13s-10_3: 13s-10.3 X10.P$1 | length 121.8
  Bottom Layer w1: X10.P$1 74.259,50.753 82.423,58.917 82.423,140.97 97.233,155.78 97.233,159.195 13s-10.3
Net13s-10_4: 13s-10.4 X10.P$2 | length 113.5
  Top Layer w1: X10.P$2 70.929,55.943 72.58,55.943 81.28,64.643 81.28,144.145 92.583,155.448 13s-10.4
Net20a-11_1: 20a-11.1 X13.P$1 | length 83.3
  Bottom Layer w1: X13.P$1 107.95,37.06 107.95,41.529 96.647,52.832 96.647,91.313 100.838,95.504 108.543,95.504 20a-11.1
Net20a-11_2: 20a-11.2 X13.P$2 | length 72.9
  Top Layer w1: X13.P$2 95.123,47.903 95.123,95.631 99.102,99.61 20a-11.2
Net20a-12_1: 20a-12.1 X12.P$1 | length 24.5
  Bottom Layer w1: X12.P$1 107.268,50.753 112.903,56.388 112.903,69.723 20a-12.1
Net20a-12_2: 20a-12.2 X12.P$2 | length 14.7
  Top Layer w1: X12.P$2 104.719,56.078 104.719,69.247 20a-12.2
Net20a-13_1: 20a-13.1 X11.P$1 | length 99.2
  Bottom Layer w1: X11.P$1 88.061,34.02 88.061,34.975 93.218,40.132 93.218,105.029 97.409,109.22 111.252,109.22 112.545,110.513 112.545,114.323 20a-13.1
Net20a-13_2: 20a-13.2 X11.P$2 | length 89.3
  Top Layer w1: X11.P$2 91.313,42.272 91.313,110.871 94.869,114.427 20a-13.2
Net20a-14_1: 20a-14.1 X14.P$1 | length 57.4
  Bottom Layer w1: 20a-14.1 112.796,84.647 112.796,80.879 117.856,75.819 117.856,46.99 124.587,40.259 124.587,36.976 X14.P$1
Net20a-14_2: 20a-14.2 X14.P$2 | length 62.4
  Top Layer w1: 20a-14.2 99.187,78.532 99.187,52.984 113.476,38.695 X14.P$2
Net24v_P: 24v.P XL.1 XR.1
Net40H_1: 40H.1 J13.4 | length 28.8
  Top Layer w0.254: 40H.1 30.734,97.79 30.734,85.502 J13.4
Net40H_2: 40H.2 J13.3 R13.1 | length 37.2
  Top Layer w0.254: 40H.2 27.94,86.296 J13.3 43.609,70.627 R13.1
Net40H_3: 40H.3 J14.4 | length 43.1
  Top Layer w0.254: 40H.3 31.496,100.584 33.909,98.171 33.909,86.868 46.705,74.072 J14.4@56.007,74.072
Net40H_4: 40H.4 J14.3 R14.1 | length 51
  Top Layer w0.254: 40H.4 29.21,99.314 30.989,99.314 32.766,97.537 32.766,85.979 46.673,72.072 J14.3@56.007,72.072 ; J14.3 60.404,72.072 R14.1
Net40H_5: 40H.5 J15.4 | length 22.2
  Top Layer w0.254: 40H.5 32.512,103.124 35.814,99.822 35.814,91.694 37.894,89.614 J15.4
Net40H_6: 40H.6 J15.3 R15.1 | length 31.1
  Top Layer w0.254: 40H.6 29.479,101.585 32.527,101.585 34.671,99.441 34.671,89.916 36.973,87.614 J15.3 46.894,87.614 R15.1
Net40H_7: 40H.7 J12.4 | length 32.1
  Top Layer w0.254: 40H.7 34.036,105.664 49.52,90.18 J12.4
Net40H_8: 40H.8 J12.3 R12.1 | length 40.4
  Top Layer w0.254: 40H.8 28.076,105.528 28.711,105.528 29.718,104.521 33.147,104.521 49.488,88.18 J12.3 61.06,88.18 R12.1
Net40H_9: 40H.9 J10.4 | length 12.4
  Top Layer w0.254: 40H.9 34.671,108.204 36.767,106.108 J10.4
Net40H_10: 40H.10 J10.3 R10.1 | length 20.4
  Top Layer w0.254: 40H.10 29.337,106.807 34.163,106.807 36.862,104.108 J10.3 46.529,104.108 R10.1
Net40H_11: 40H.11 J11.4 | length 27.5
  Top Layer w0.254: 40H.11 51.678,110.744 J11.4
Net40H_12: 40H.12 J11.3 R11.1 | length 35.6
  Top Layer w0.254: 40H.12 29.21,109.474 50.948,109.474 J11.3 60.7,104.288 R11.1
Net40H_13: 40H.13 J16.4 | length 38.3
  Top Layer w0.254: 40H.13 62.992,113.284 65.501,110.775 J16.4
Net40H_14: 40H.14 J16.3 R16.1 | length 45.8
  Top Layer w0.254: 40H.14 29.083,112.141 62.23,112.141 65.596,108.775 J16.3 71.834,108.775 R16.1
Net40H_15: 40H.15 J9.4 | length 47
  Top Layer w0.254: 40H.15 31.369,114.935 59.229,114.935 64.516,120.222 64.516,126.65 J9.4
Net40H_16: 40H.16 J9.3 R9.1 | length 52.8
  Top Layer w0.254: 40H.16 29.464,114.3 59.312,114.3 65.151,120.139 65.151,125.285 J9.3 71.58,127.444 R9.1
Net40H_17: 40H.17 J8.4 | length 13.2
  Top Layer w0.254: 40H.17 38.069,118.364 J8.4
Net40H_18: 40H.18 J8.3 R8.1 | length 20.2
  Top Layer w0.254: 40H.18 29.083,117.221 38.926,117.221 J8.3 46.322,120.332 R8.1
Net40H_21: 40H.21 CS5.01 | length 318.9
  Top Layer w0.254: 40H.21 29.14,122.104 27.616,122.104 26.939,121.427 26.939,85.964 35.433,77.47 35.433,40.767 45.887,30.313 166.33,30.313 169.164,33.147 169.164,114.173 170.942,115.951 CS5.01
Net40H_22: 40H.22 CS4.3 | length 261.8
  Top Layer w0.254: 40H.22 26.431,121.935 26.431,85.309 34.417,77.323 34.417,40.513 45.125,29.805 167.727,29.805 170.307,32.385 170.307,57.871 173.482,61.046 CS4.3
Net40H_23: 40H.23 CS3.3 | length 244.3
  Top Layer w0.254: 40H.23 29.21,124.714 27.559,124.714 25.923,123.078 25.923,84.567 33.401,77.089 33.401,40.259 44.196,29.464 44.363,29.297 168.997,29.297 171.196,31.496 171.196,37.55 CS3.3
Net40H_24: 40H.24 CS1.3 | length 85.7
  Top Layer w0.254: 40H.24 27.751,125.795 27.37,125.795 25.415,123.84 25.415,77.074 32.477,70.012 32.477,50.997 30.416,48.936 CS1.3
Net40H_25: 40H.25 CS2.3 | length 64.1
  Top Layer w0.254: CS2.3 30.416,70.571 30.267,70.721 30.267,70.825 24.907,76.185 24.907,125.11 27.051,127.254 29.21,127.254 40H.25
Net40H_26: 40H.26 CS6.01 | length 165
  Top Layer w0.254: 40H.26 27.94,129.648 25.146,132.442 25.146,181.102 30.607,186.563 44.843,186.563 46.101,187.821 46.101,192.527 44.699,193.929 40.386,193.929 39.497,194.818 39.497,205.359 40.259,206.121 100.266,206.121 CS6.01
Net40H_27: 40H.27 J7.4 | length 29.2
  Top Layer w0.254: 40H.27 31.496,130.048 48.482,130.048 J7.4
Net40H_28: 40H.28 J7.3 R7.1 | length 36.7
  Top Layer w0.254: 40H.28 29.479,129.525 47.005,129.525 J7.3 60.087,120.395 R7.1
Net40H_29: 40H.29 J6.4 | length 29.6
  Top Layer w0.254: 40H.29 32.753,131.331 48.962,131.331 J6.4
Net40H_30: 40H.30 J6.3 R6.1 | length 36
  Top Layer w0.254: 40H.30 29.337,132.207 30.988,132.207 32.512,130.683 50.314,130.683 J6.3 60.288,136.503 R6.1
Net40H_31: 40H.31 J5.4 | length 12.6
  Top Layer w0.254: 40H.31 39.942,136.144 J5.4
Net40H_32: 40H.32 J5.3 R5.1 | length 19.4
  Top Layer w0.254: 40H.32 28.941,135.143 40.941,135.143 J5.3 46.308,136.366 R5.1
Net40H_33: 40H.33 J4.4 | length 32.3
  Top Layer w0.254: 40H.33 38.354,138.684 54.166,154.496 56.019,154.496 J4.4
Net40H_34: 40H.34 J4.3 R4.1 | length 39.5
  Top Layer w0.254: 40H.34 29.337,137.287 38.735,137.287 54.059,152.611 J4.3 60.383,152.611 R4.1
Net40H_35: 40H.35 J3.4 | length 22.5
  Top Layer w0.254: 40H.35 37.719,141.224 40.894,144.399 40.894,153.399 J3.4
Net40H_36: 40H.36 J3.3 R3.1 | length 31
  Top Layer w0.254: 40H.36 29.21,139.954 37.973,139.954 44.069,146.05 44.069,150.764 J3.3 R3.1
Net40H_37: 40H.37 J2.4 | length 43.1
  Top Layer w0.254: 40H.37 36.322,143.764 38.989,146.431 38.989,157.099 52.609,170.719 J2.4
Net40H_38: 40H.38 J2.3 R2.1 | length 49.9
  Top Layer w0.254: 40H.38 28.941,142.763 37.226,142.763 39.983,145.52 39.983,155.934 52.768,168.719 J2.3 60.277,168.719 R2.1
Net40H_39: 40H.39 J1.4 | length 32.3
  Top Layer w0.254: 40H.39 35.306,146.304 36.957,147.955 36.957,165.766 J1.4
Net40H_40: 40H.40 J1.3 R1.1 | length 39.6
  Top Layer w0.254: 40H.40 29.21,145.034 35.941,145.034 37.973,147.066 37.973,164.782 J1.3 46.657,168.973 R1.1
NetBuck_3: Buck.3 CS1.1 CS2.1 CS3.1 CS4.1 CS5.04 CS6.04 | length 533.7
  Top Layer w1: CS1.1 23.876,49.34 ; CS2.1 23.876,74.231 ; Buck.3 30.535,190.174 23.876,183.515 ; CS6.04 110.356,203.652 110.356,204.492 107.846,207.002 31.615,207.002 23.876,199.263 23.876,183.515 ; CS4.1 178.498,62.166 ; CS3.1 178.498,37.49 ; CS5.04 178.498,62.166 ; 23.876,49.34 23.876,32.385 27.94,28.321 176.53,28.321 178.498,30.29 178.498,37.49 ; 23.876,49.34 23.876,74.231 ; 23.876,74.231 23.876,183.515 ; 178.498,37.49 178.498,62.166
pads on no net: 40H.19 40H.20 CS1.SH1 CS1.SH2 CS2.SH1 CS2.SH2 CS3.SH1 CS3.SH2 CS4.SH1 CS4.SH2 CS5.03 CS6.03 J1.2 J2.2 J3.2 J4.2 J5.2 J6.2 J7.2 J8.2 J9.2 J10.2 J11.2 J12.2 J13.2 J14.2 J15.2 J16.2

## Polygon pours and split planes (outlines as drawn)
Net12v_P on Top Layer "NET12V_P_L01_P017" (solid, pour order 17): 129.667,132.969 129.667,65.151 138.557,65.151 138.557,132.969
Net12v_P on Top Layer "NET12V_P_L01_P023" (solid, pour order 23): 108.077,193.675 108.077,178.054 53.721,178.054 53.721,193.675
Net24v_P on Top Layer "NET24V_P_L01_P000" (solid, pour order 0): 40,209.5 181.5,209.5 181.5,194.818 40,194.818
Net12v_P on Top Layer "NET12V_P_L01_P016" (solid, pour order 16): 106.934,193.675 138.557,193.675 138.557,125.222 106.934,125.222
Net24v_P on Top Layer "NET24V_P_L01_P008" (solid, pour order 8): 168,150.495 181.5,150.495 181.5,197.104 168,197.104
GND on Bottom Layer "Bottom Layer-GND" (solid, pour order 26): 112.25,182.626 133.45,182.626 133.45,119 112.25,119
GND on Bottom Layer "GND_L02_P009" (solid, remove dead copper, pour order 9): 22.5,209.5 22.5,193.421 181.5,193.421 181.5,209.5
GND on Bottom Layer "GND_L02_P012" (solid, pour order 12): 22.5,83.693 39.941,83.693 39.941,26.5 22.5,26.5
GND on Bottom Layer "GND_L02_P018" (solid, remove dead copper, pour order 18): 22.5,194.31 73.279,194.31 73.279,64.135 22.5,64.135
GND on Bottom Layer "GND_L02_P025" (solid, pour order 25): 39.116,64.897 48.133,64.897 48.133,26.5 39.116,26.5
GND on Bottom Layer "GND_L02_P024" (solid, pour order 24): 103.921,193.548 143.764,193.548 143.764,182.499 137.668,182.499 104.042,182.499
GND on Bottom Layer "GND_L02_P019" (solid, pour order 19): 100.965,197.358 100.965,119.126 107.061,119.126 107.061,197.358
GND on Bottom Layer "GND_L02_P022" (solid, pour order 22): 129.667,65.278 129.667,123.317 121.539,123.317 121.539,65.278
GND on Bottom Layer "GND_L02_P010" (solid, remove dead copper, pour order 10): 168,196.723 181.5,196.723 181.5,26.5 168,26.5
GND on Bottom Layer "GND_L02_P021" (solid, pour order 21): 100.965,119 144.5,119 144.5,125.476 100.965,125.476
GND on Bottom Layer "GND_L02_P020" (solid, pour order 20): 138.368,193.548 138.368,125.095 144.5,125.095 144.5,193.548

## Other copper
Top Layer:
  pour cut-out: 177,209.5 cw(c177,205) 181.5,205 181.5,209.5
Bottom Layer:
  pour cut-out: 177,209.5 cw(c177,205) 181.5,205 181.5,209.5
  pour cut-out: 181.5,31 cw(c177,31) 177,26.5 181.5,26.5
  pour cut-out: 22.5,205 cw(c27,205) 27,209.5 22.5,209.5
  pour cut-out: 27,26.5 cw(c27,31) 22.5,31 22.5,26.5

## Silkscreen, mask and mechanical layers (free items; w line width, h text height)
Top Overlay:
  drawing of 3 lines, arcs and shapes, not listed
Bottom Overlay:
  drawing of 46 lines, arcs and shapes, not listed
  text "Suhail Malik" at 174.96,105.364 h2.52 r90
  text "Suhail Malik" at 174.96,105.364 h2.52 r90

## Text inside footprints (layer, text, board x,y; h text height)
XL: Top Overlay "-" at 175.323,176.008 h1.52 r90; Top Overlay "+" at 174.815,152.008 h1.52 r90
XR: Top Overlay "-" at 41.201,200.787 h1.52 r180; Top Overlay "+" at 65.201,200.279 h1.52 r180